# Altium PCB StLinkV3.PcbDoc
Units mil, origin at the board's own origin, x right, y up, seen from the top; angles counter-clockwise.
Board outline 2315 x 1415 mil, 2 copper layers (Top Layer, Bottom Layer); 10 components, 26 nets, 77 pads, 19 vias.
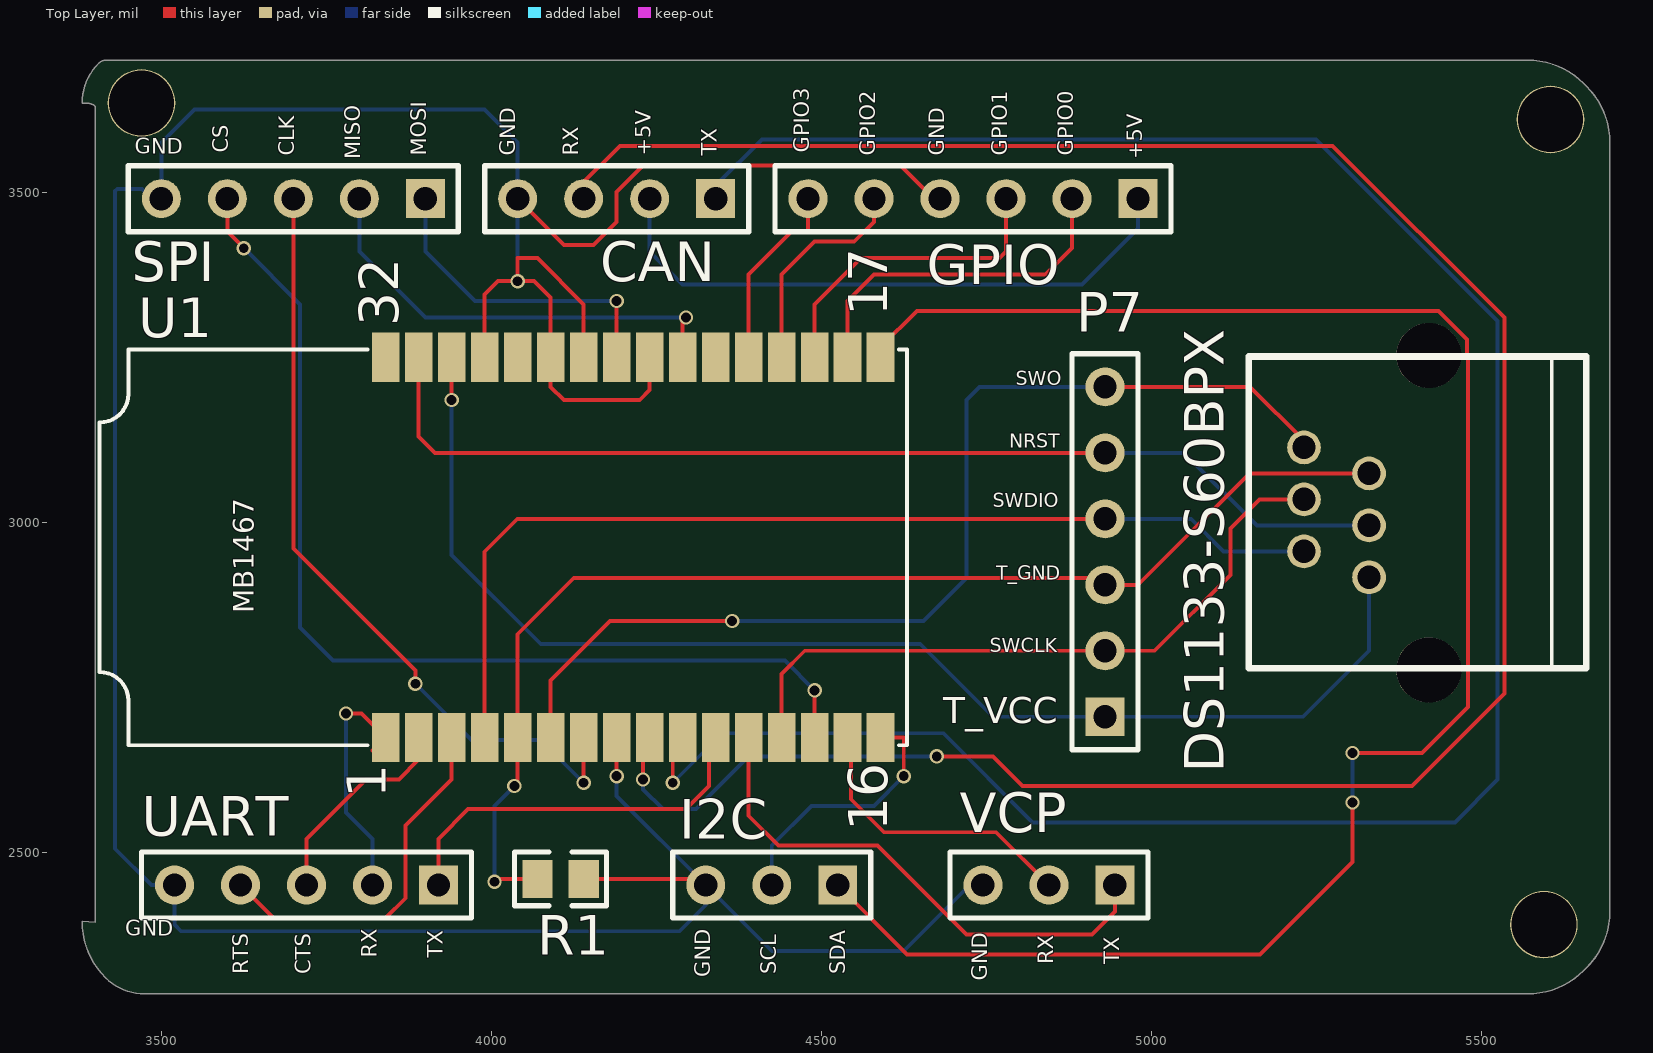
[diagram p0: Top Layer view]
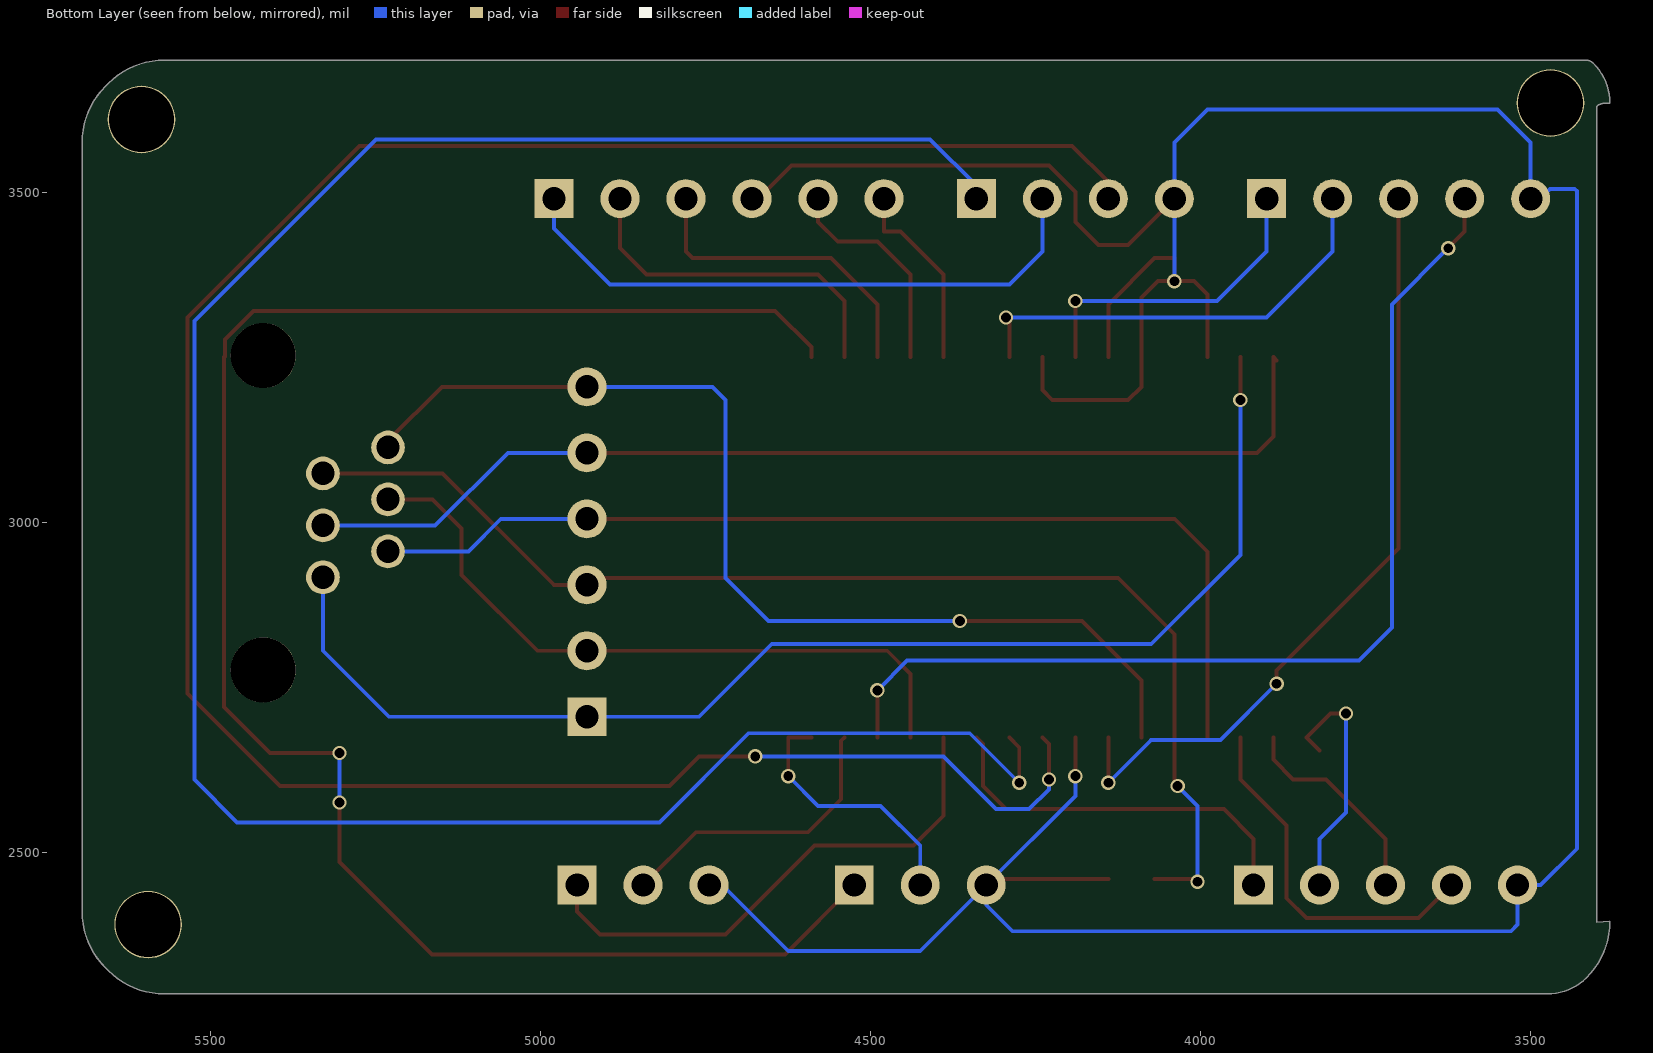
[diagram p1: Bottom Layer view, seen from below]

## Layer stack, top to bottom
Top Solder: solder mask 0.4, Solder Resist, Dk 3.5
Top Layer: signal copper 1.4
Dielectric 1: dielectric 12.6, FR-4, Dk 4.8
Bottom Layer: signal copper 1.4
Bottom Solder: solder mask 0.4, Solder Resist, Dk 3.5

## Board outline
3415.36,2309.64 cw(c3500.71,2395) 3380,2395 3400,2393.99 3400,3629.64 ccw(c3387.93,3617.57) 3387.93,3634.64 3380,3634.64 cw(c3465.36,3634.64) 3405,3695 cw(c3417.07,3682.93) 3417.07,3700 5570,3700 cw(c5570,3579.29) 5655.36,3664.64 5659.64,3660.36 cw(c5574.29,3575) 5695,3575 5695,2410 cw(c5574.29,2410) 5659.64,2324.64 5655.36,2320.36 cw(c5570,2405.71) 5570,2285 3490,2285 3474.85,2285 cw(c3474.85,2369.14)

## Design rules (kind name [scope] priority, off if disabled: settings)
Clearance [All] p1: gap=6 ignorepadtopadclearanceinfootprint=FALSE
PolygonConnect [All] p1: connectstyle=Relief reliefconductorwidth=10 reliefentries=4 polygonreliefangle="90 Angle" airgapwidth=10
RoutingVias [All] p1: holewidth=14.96 width=21.65 viastyle="Through Hole" minholewidth=11.81 minwidth=21.65 maxholewidth=39.37 maxwidth=47.24
SolderMaskExpansion [All] p1: expansion=4 istentingtop=FALSE
Width [All] p1: maxlimit=10 minlimit=5 preferedwidth=6
30 further rules are at their usual default settings.

## Components (designator, comment, footprint, x,y, rotation, side; value= is the part's Value field where it differs from the comment)
CAN "Header 4" HDR1X4 4340,3490 r180 top (schematic designator P3)
DS1133-S60BPX "RJ12" RJ11-TH_DS1133-S60BPX 5280.75,3014.7 r180 top
GPIO "Header 6" HDR1X6 4980,3490 r180 top (schematic designator P6)
I2C "Header 3" HDR1X3 4525,2450 r180 top (schematic designator P1)
P7 "Header 6" HDR1X6 4930,2705 r90 top
R1 "0Ω (0R0) ±1%" 0805_R 4105,2459.25 r180 top
SPI "Header 5" HDR1X5 3900,3490 r180 top (schematic designator P5)
U1 "STLINK-V3MODS" mod_stlink-v3m_m 3450,2961.81 r90 top value=Value
UART "Header 5" HDR1X5 3920,2450 r180 top (schematic designator P4)
VCP "Header 3" HDR1X3 4945,2450 r180 top (schematic designator P2)

## Footprints (in the part's own frame and the unit in brackets; to place one, negate y for a bottom-side part, rotate by r counter-clockwise, add the part's x,y. Pads: shape width x height; smd on the part's side, far side on the other; paste and mask are expansions set on the pad)
0805_R [mm]
  rect 1.16x1.47 smd: 1(-0.89,0) 2(0.89,0)
  silkscreen extent -1.77,-1.04 1.77,1.03, body extent -1,-0.62 1,0.63, height 0.49
HDR1X3 [mm] "Connector; Header; 3 Position"
  rect 1.5x1.5 hole 0.9: 1(0,0)
  round 1.5 hole 0.9: 2(2.54,0) 3(5.08,0)
  silkscreen extent -1.27,-1.27 6.35,1.27
HDR1X4 [mm] "Connector; Header; 4 Position"
  rect 1.5x1.5 hole 0.9: 1(0,0)
  round 1.5 hole 0.9: 2(2.54,0) 3(5.08,0) 4(7.62,0)
  silkscreen extent -1.27,-1.27 8.89,1.27
HDR1X5 [mm] "Connector; Header; 5 Position"
  rect 1.5x1.5 hole 0.9: 1(0,0)
  round 1.5 hole 0.9: 2(2.54,0) 3(5.08,0) 4(7.62,0) 5(10.16,0)
  silkscreen extent -1.27,-1.27 11.43,1.27
HDR1X6 [mm] "Connector; Header; 6 Position"
  rect 1.5x1.5 hole 0.9: 1(0,0)
  round 1.5 hole 0.9: 2(2.54,0) 3(5.08,0) 4(7.62,0) 5(10.16,0) 6(12.7,0)
  silkscreen extent -1.27,-1.27 13.97,1.27
mod_stlink-v3m_m [mil]
  rect 74.8x42.13 smd paste+0 mask+1: 1(-288.19,-390) 2(-288.19,-440) 3(-288.19,-490) 4(-288.19,-540) 5(-288.19,-590) 6(-288.19,-640) 7(-288.19,-690) 8(-288.19,-740) 9(-288.19,-790) 10(-288.19,-840) 11(-288.19,-890) 12(-288.19,-940) 13(-288.19,-990) 14(-288.19,-1040) 15(-288.19,-1090) 16(-288.19,-1140) 17(288.19,-1140) 18(288.19,-1090) 19(288.19,-1040) 20(288.19,-990) 21(288.19,-940) 22(288.19,-890) 23(288.19,-840) 24(288.19,-790) 25(288.19,-740) 26(288.19,-690) 27(288.19,-640) 28(288.19,-590) 29(288.19,-540) 30(288.19,-490) 31(288.19,-440) 32(288.19,-390)
  silkscreen extent -300,-1180 300,43, body extent 0,0 10,10, height 10
RJ11-TH_DS1133-S60BPX [mm]
  round 1.3 hole 0.9: 1(1.251,-2.499) 2(-1.251,-1.499) 3(1.251,-0.5) 4(-1.251,0.5) 5(1.251,1.501) 6(-1.251,2.499)
  round 2.5 hole 2.5 unplated: ""(-3.552,6.063) ""(-3.552,-6.037)
  silkscreen extent -9.62,-6 3.38,6

## Part data
CAN: "Header, 4-Pin", LatestRevisionDate=17-Jul-2002, LatestRevisionNote="Re-released for DXP Platform.", Publisher="Altium Limited"
DS1133-S60BPX: library part RJ12-DS1133-S60BPX, BOM_Manufacturer=CONNFLY, BOM_Manufacturer Part=DS1133-S60BPX, BOM_Supplier=LCSC, BOM_Supplier Part=C77859, spicePre=R, spiceSymbolName=DS1133-S60BPX
GPIO P7: "Header, 6-Pin", LatestRevisionDate=17-Jul-2002, LatestRevisionNote="Re-released for DXP Platform.", Publisher="Altium Limited"
I2C VCP: "Header, 3-Pin", LatestRevisionDate=17-Jul-2002, LatestRevisionNote="Re-released for DXP Platform.", Publisher="Altium Limited"
R1: library part "0805 0Ω (0R0) 1%", "贴片电阻", Package=0805, SuppliersPartNumber=C17477, ComponentLink1Description=供应商链接, ComponentLink1URL=http://www.szlcsc.com/product/details_18165.html, Supplier=LC
SPI UART: "Header, 5-Pin", LatestRevisionDate=17-Jul-2002, LatestRevisionNote="Re-released for DXP Platform.", Publisher="Altium Limited"
U1: "Imported", Manufacturer_Part_Number=STLINK-V3MOS, Built_By=EMA_Rocco, Copyright="Copyright (C) 2018 Accelerated Designs. All rights reserved", RefDes=RefDes, Type=Type, Vendor=STMicroelectronics

## Free pads (board coordinates)
  round 102.36 hole 98.43: ""(3470,3635) ""(5595,2390) ""(5605,3610)

## Via types
v1: diameter 21.65, hole 14.96, Top Layer to Bottom Layer, 19 vias

## Nets (pads, with @x,y where several pads share a name; then routed paths per layer and width w, separated by ;. In a path a pad name is that pad's centre, name@x,y a point inside that pad or via, vN(x,y) a via of type N, cw(c..) or ccw(c..) an arc to the next point about the centre after c; other vN are vias at no path point)
+5V: CAN.2 GPIO.1 | length 920.9
  Bottom Layer w6: CAN.2 4240,3410 4290,3360 4895,3360 4980,3445 GPIO.1
CAN_RX: CAN.3 U1.9 | length 3630.4
  Top Layer w6: CAN.3 4140,3515 4195,3570 5275,3570 5535,3310 5535,2740 5395,2600 4805,2600 4760,2645 v1(4675,2645) ; v1(4230,2610) 4230,2663.62 U1.9
  Bottom Layer w6: v1(4230,2610) 4230,2595 4260,2565 4310,2565 4390,2645 v1(4675,2645)
CAN_TX: CAN.1 U1.10 | length 3481.6
  Top Layer w6: v1(4275,2605) 4275,2658.62 U1.10
  Bottom Layer w6: v1(4275,2605) 4350,2680 4685,2680 4820,2545 5460,2545 5525,2610 5525,3305 5250,3580 4410,3580 4340,3510 CAN.1
GND: CAN.4 GPIO.4 I2C.3 R1.1 SPI.5 U1.8 U1.24 U1.26 U1.27 U1.29 UART.5 VCP.3 | length 5523.1
  Top Layer w6: U1.29 3990,3345 4010,3365 v1(4040,3365) ; CAN.4 4110,3420 4155,3420 4190,3455 4190,3500 4230,3540 4620,3540 4670,3490 GPIO.4 ; U1.26 4140,3330 4070,3400 4040,3400 v1(4040,3365) ; R1.1 4315.75,2459.25 I2C.3 ; v1(4190,2615) U1.8 ; U1.24 4240,3200 4225,3185 4110,3185 4090,3205 U1.27 4090,3340 4065,3365 v1(4040,3365)
  Bottom Layer w6: v1(4040,3365) CAN.4 4040,3575 3990,3625 3550,3625 3500,3575 SPI.5 3485.64,3490 3470.64,3505 3433.51,3505 3430,3501.49 3430,2505 3485,2450 UART.5 3520,2390 3530,2380 4285,2380 4325,2420 I2C.3 ; v1(4190,2615) 4190,2585 I2C.3 ; VCP.3 4725,2450 4625,2350 4425,2350 I2C.3
GPIO0: GPIO.2 U1.18 | length 533.1
  Top Layer w6: U1.18 4540,3335 4580,3375 4840,3375 4880,3415 GPIO.2
GPIO1: GPIO.3 U1.19 | length 483.1
  Top Layer w6: U1.19 4490,3330 4560,3400 4770,3400 4780,3410 GPIO.3
GPIO2: GPIO.5 U1.20 | length 333.1
  Top Layer w6: U1.20 4440,3375 4490,3425 4550,3425 4580,3455 GPIO.5
GPIO3: GPIO.6 U1.21 | length 291.9
  Top Layer w6: U1.21 4390,3375 4455,3440 4480,3440 GPIO.6
I2C_SCL: I2C.2 U1.16 | length 397.1
  Top Layer w6: U1.16 4625,2673.62 v1(4625,2615)
  Bottom Layer w6: I2C.2 4425,2510 4485,2570 4580,2570 v1(4625,2615)
I2C_SDA: I2C.1 U1.17 | length 2752.1
  Top Layer w6: I2C.1 4630,2345 5165,2345 5305,2485 v1(5305,2575) ; U1.17 4590,3265 4645,3320 5435.28,3320 5478.8,3276.47 5478.8,3251.2 5480,3250 5480,2720 5410,2650 v1(5305,2650)
  Bottom Layer w6: v1(5305,2575) v1(5305,2650)
SPI_CLK: SPI.3 U1.7 | length 1197.4
  Top Layer w6: SPI.3 3700,2960 3885,2775 v1(3885,2755) ; v1(4140,2605) U1.7
  Bottom Layer w6: v1(3885,2755) 3970,2670 4075,2670 v1(4140,2605)
SPI_MISO: SPI.2 U1.23 | length 678.5
  Top Layer w6: U1.23 4290,3305 v1(4295,3310)
  Bottom Layer w6: SPI.2 3800,3410 3900,3310 v1(4295,3310)
SPI_MOSI: SPI.1 U1.25 | length 486.1
  Top Layer w6: U1.25 v1(4190,3335)
  Bottom Layer w6: SPI.1 3900,3410 3975,3335 v1(4190,3335)
SPI_NSS: SPI.4 U1.14 | length 1586.3
  Top Layer w6: SPI.4 3600,3440 v1(3625,3415) ; U1.14 v1(4490,2745)
  Bottom Layer w6: v1(3625,3415) 3710,3330 3710,2840 3760,2790 4445,2790 v1(4490,2745)
T_GND: DS1133-S60BPX.2 P7.3 R1.2 U1.5 | length 1855.4
  Top Layer w6: v1(4005,2455) 4009.25,2459.25 R1.2 ; v1(4035,2600) 4040,2605 U1.5 4040,2830 4125,2915 4920,2915 P7.3 4980,2905 5148.7,3073.7 DS1133-S60BPX.2
  Bottom Layer w6: v1(4005,2455) 4005,2570 v1(4035,2600)
T_NRST: DS1133-S60BPX.4 P7.5 U1.31 | length 1623
  Top Layer w6: U1.31@3885,3245 U1.31 3890,3130 3915,3105 P7.5
  Bottom Layer w6: P7.5 5050,3105 5160,2995 DS1133-S60BPX.4
T_SWCLK: DS1133-S60BPX.3 P7.2 U1.13 | length 1038.4
  Top Layer w6: U1.13 4440,2770 4475,2805 P7.2 5005,2805 5120,2920 5120,2990 5164.4,3034.4 DS1133-S60BPX.3
T_SWDIO: DS1133-S60BPX.5 P7.4 U1.4 | length 1564.1
  Top Layer w6: U1.4 3990,2955 4040,3005 P7.4
  Bottom Layer w6: P7.4 5060,3005 5109.4,2955.6 DS1133-S60BPX.5
T_SWO: DS1133-S60BPX.1 P7.6 U1.6 | length 1614.5
  Top Layer w6: U1.6 4090,2760 4180,2850 v1(4365,2850) ; P7.6 5150,3205 5231.5,3123.5 DS1133-S60BPX.1
  Bottom Layer w6: v1(4365,2850) 4655,2850 4720,2915 4720,3185 4740,3205 P7.6
T_VCC: DS1133-S60BPX.6 P7.1 U1.30 | length 1944.2
  Top Layer w6: v1(3940,3185) U1.30
  Bottom Layer w6: v1(3940,3185) 3940,2950 4075,2815 4650,2815 4760,2705 P7.1 5230,2705 5330,2805 DS1133-S60BPX.6
UART_CTS: U1.2 UART.3 | length 323.3
  Top Layer w6: UART.3 3720,2520 3810,2610 3860,2610 3890,2640 U1.2
UART_RTS: U1.3 UART.4 | length 555.8
  Top Layer w6: UART.4 3670,2400 3840,2400 3870,2430 3870,2540 3940,2610 U1.3
UART_RX: U1.1 UART.2 | length 379.9
  Top Layer w6: v1(3780,2710) 3803.62,2710 U1.1 U1.1@3820,2653.62
  Bottom Layer w6: v1(3780,2710) 3780,2560 3820,2520 UART.2
UART_TX: U1.11 UART.1 | length 590.9
  Top Layer w6: UART.1 3920,2520 3965,2565 4295,2565 4330,2600 4330,2663.62 U1.11
VCP_RX: U1.15 VCP.2 | length 449.5
  Top Layer w6: U1.15 4545,2668.62 4545,2580 4595,2530 4765,2530 VCP.2
VCP_TX: U1.12 VCP.1 | length 802.7
  Top Layer w6: U1.12 4390,2555 4435,2510 4585,2510 4720,2375 4910,2375 4945,2410 VCP.1
pads on no net: DS1133-S60BPX. U1.22 U1.28 U1.32

## Silkscreen, mask and mechanical layers (free items; w line width, h text height)
Top Overlay:
  text "CS" at 3610,3560 h40 r90
  text "GPIO3" at 4490,3560 h40 r90
  text "CLK" at 3710,3555 h40 r90
  text "MOSI" at 3910,3555 h40 r90
  text "GND" at 4045,3555 h40 r90
  text "RX" at 4140,3555 h40 r90
  text "+5V" at 4250,3555 h40 r90
  text "TX" at 4350,3555 h40 r90
  text "GPIO2" at 4590,3555 h40 r90
  text "GND" at 4695,3555 h40 r90
  text "GPIO1" at 4790,3555 h40 r90
  text "GPIO0" at 4890,3555 h40 r90
  text "GND" at 3460,3550 h40
  text "MISO" at 3810,3550 h40 r90
  text "+5V" at 4995,3550 h40 r90
  text "SWO" at 4795,3200 h36
  text "NRST" at 4785,3105 h36
  text "SWDIO" at 4760,3015 h36
  text "T_GND" at 4765,2905 h36
  text "SWCLK" at 4755,2795 h36
  text "T_VCC" at 4685,2695 h40
  text "GND" at 3445,2365 h40
  text "RX" at 3835,2340 h40 r90
  text "TX" at 3935,2340 h40 r90
  text "RX" at 4860,2330 h40 r90
  text "TX" at 4960,2330 h40 r90
  text "RTS" at 3640,2315 h40 r90
  text "CTS" at 3735,2315 h40 r90
  text "SCL" at 4440,2315 h40 r90
  text "SDA" at 4545,2315 h40 r90
  text "GND" at 4340,2310 h40 r90
  text "GND" at 4760,2305 h40 r90
Mechanical 1:
  lines w10: 3380,2395 ccw(c3500.71,2395) 3415.36,2309.64 ccw(c3474.85,2369.14) 3474.85,2285 3490,2285 5570,2285 ccw(c5570,2405.71) 5655.36,2320.36 5659.64,2324.64 ccw(c5574.29,2410) 5695,2410 5695,3575 ccw(c5574.29,3575) 5659.64,3660.36 5655.36,3664.64 ccw(c5570,3579.29) 5570,3700 3430,3700 3417.07,3700 ccw(c3417.07,3682.93) 3405,3695 ccw(c3465.36,3634.64) 3380,3634.64 3387.93,3634.64 cw(c3387.93,3617.57) 3400,3629.64 3400,2393.99 3380,2395

## Text inside footprints (layer, text, board x,y; h text height)
U1: Top Overlay "MB1467" at 3640,2861.81 h31 r90; Top Overlay "32" at 3859,3296.81 h59 r90; Top Overlay "17" at 4600,3311.81 h59 r90; Top Overlay "16" at 4600,2531.81 h59 r90; Top Overlay "1" at 3840,2581.81 h59 r90; Mechanical 15 "70.87 MIL" at 3450,2961.81 h50 r90; Mechanical 15 "66.93 MIL" at 3450,2961.81 h50 r90; Mechanical 13 "Comment" at 3450,2961.81 h75 r90; Mechanical 13 "RefDes2" at 3450,2961.81 h31 r90; Multi-Layer "Copyright (C) 2018 Accelerated Designs. All rights reserved" at 3450,2961.81 h1 r90